# Altium PCB PCB1.PcbDoc
Units mil, origin at the board's own origin, x right, y up, seen from the top; angles counter-clockwise.
Board outline 4809.97 x 3955.21 mil, 2 copper layers (Top Layer, Bottom Layer); 10 components, 11 nets, 59 pads, 0 vias.
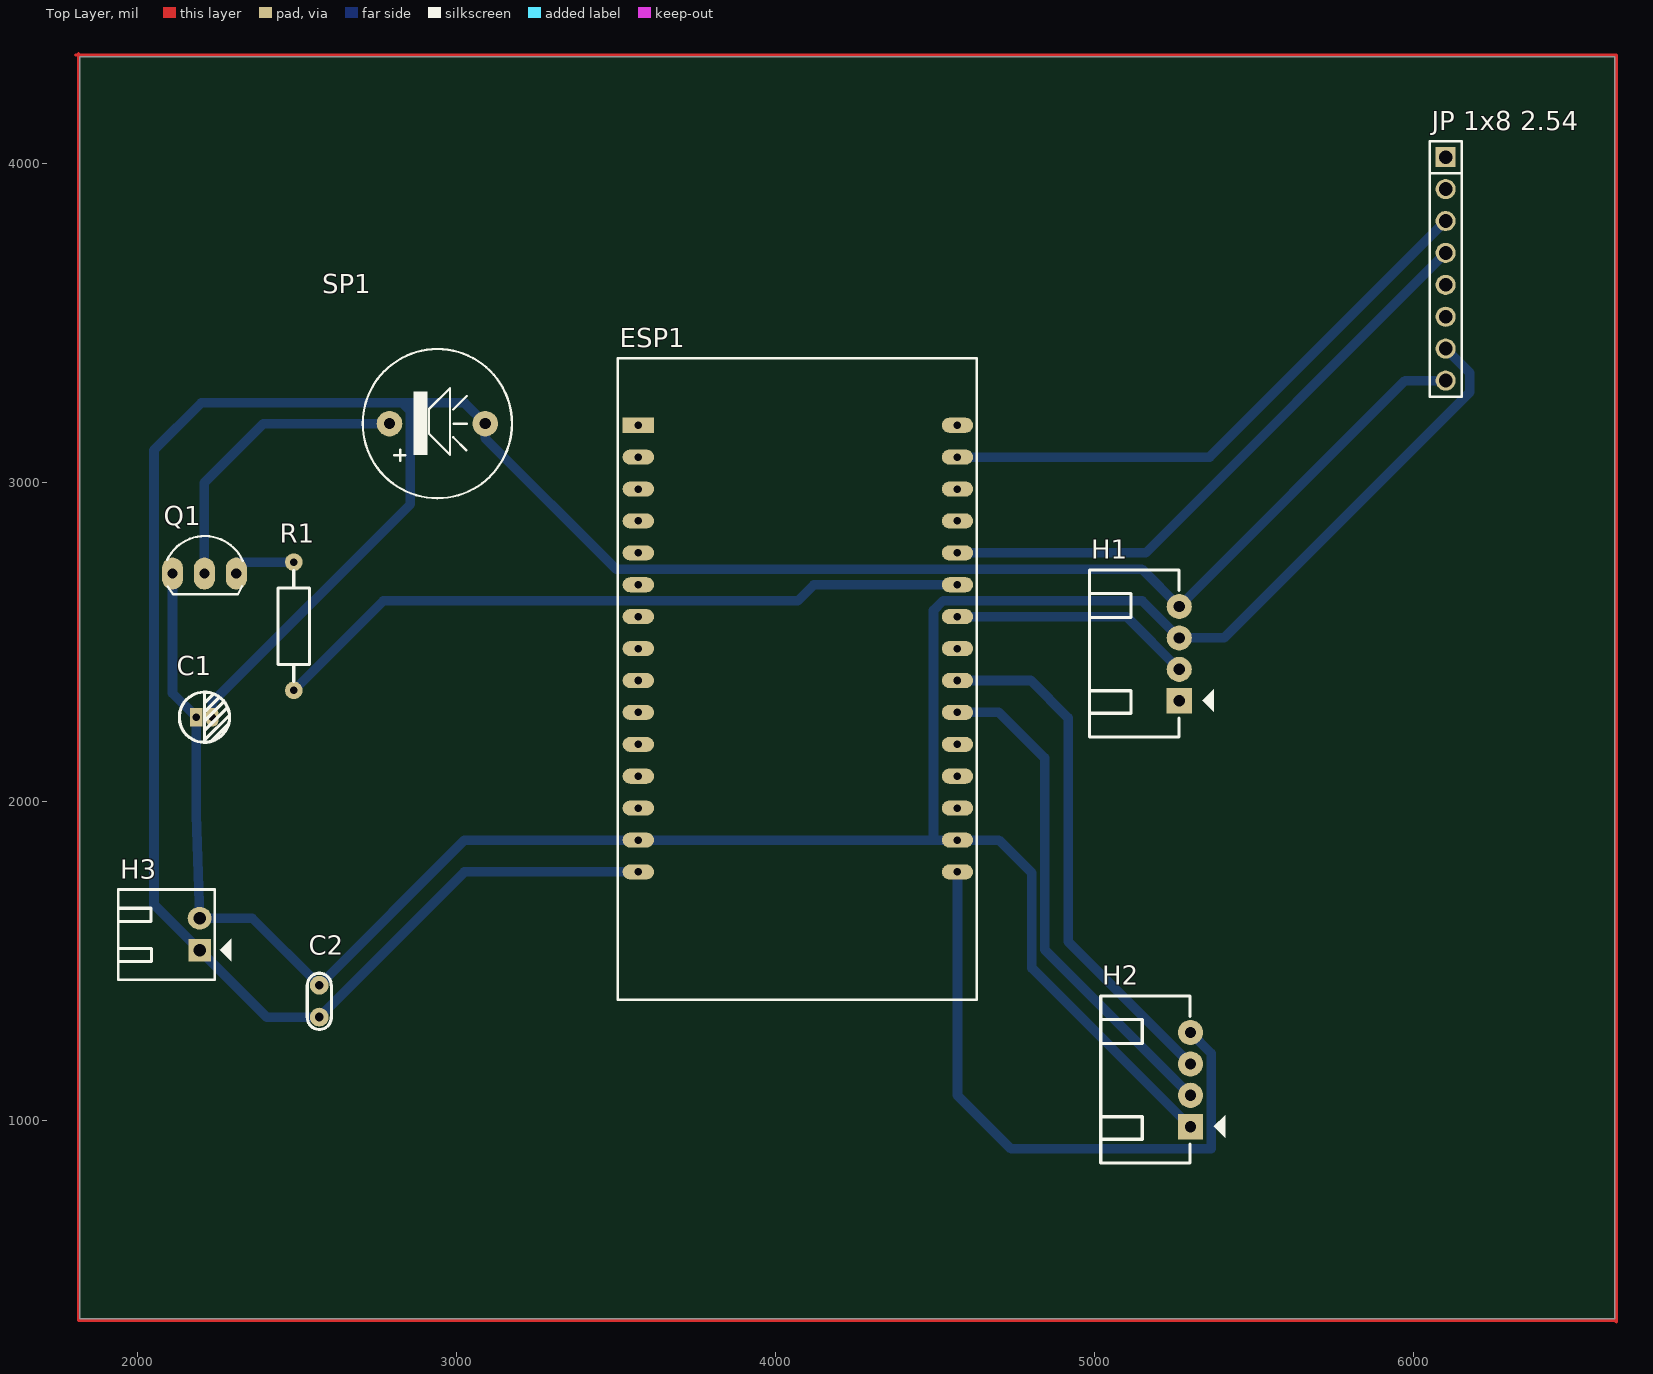
[diagram p0: Top Layer view]
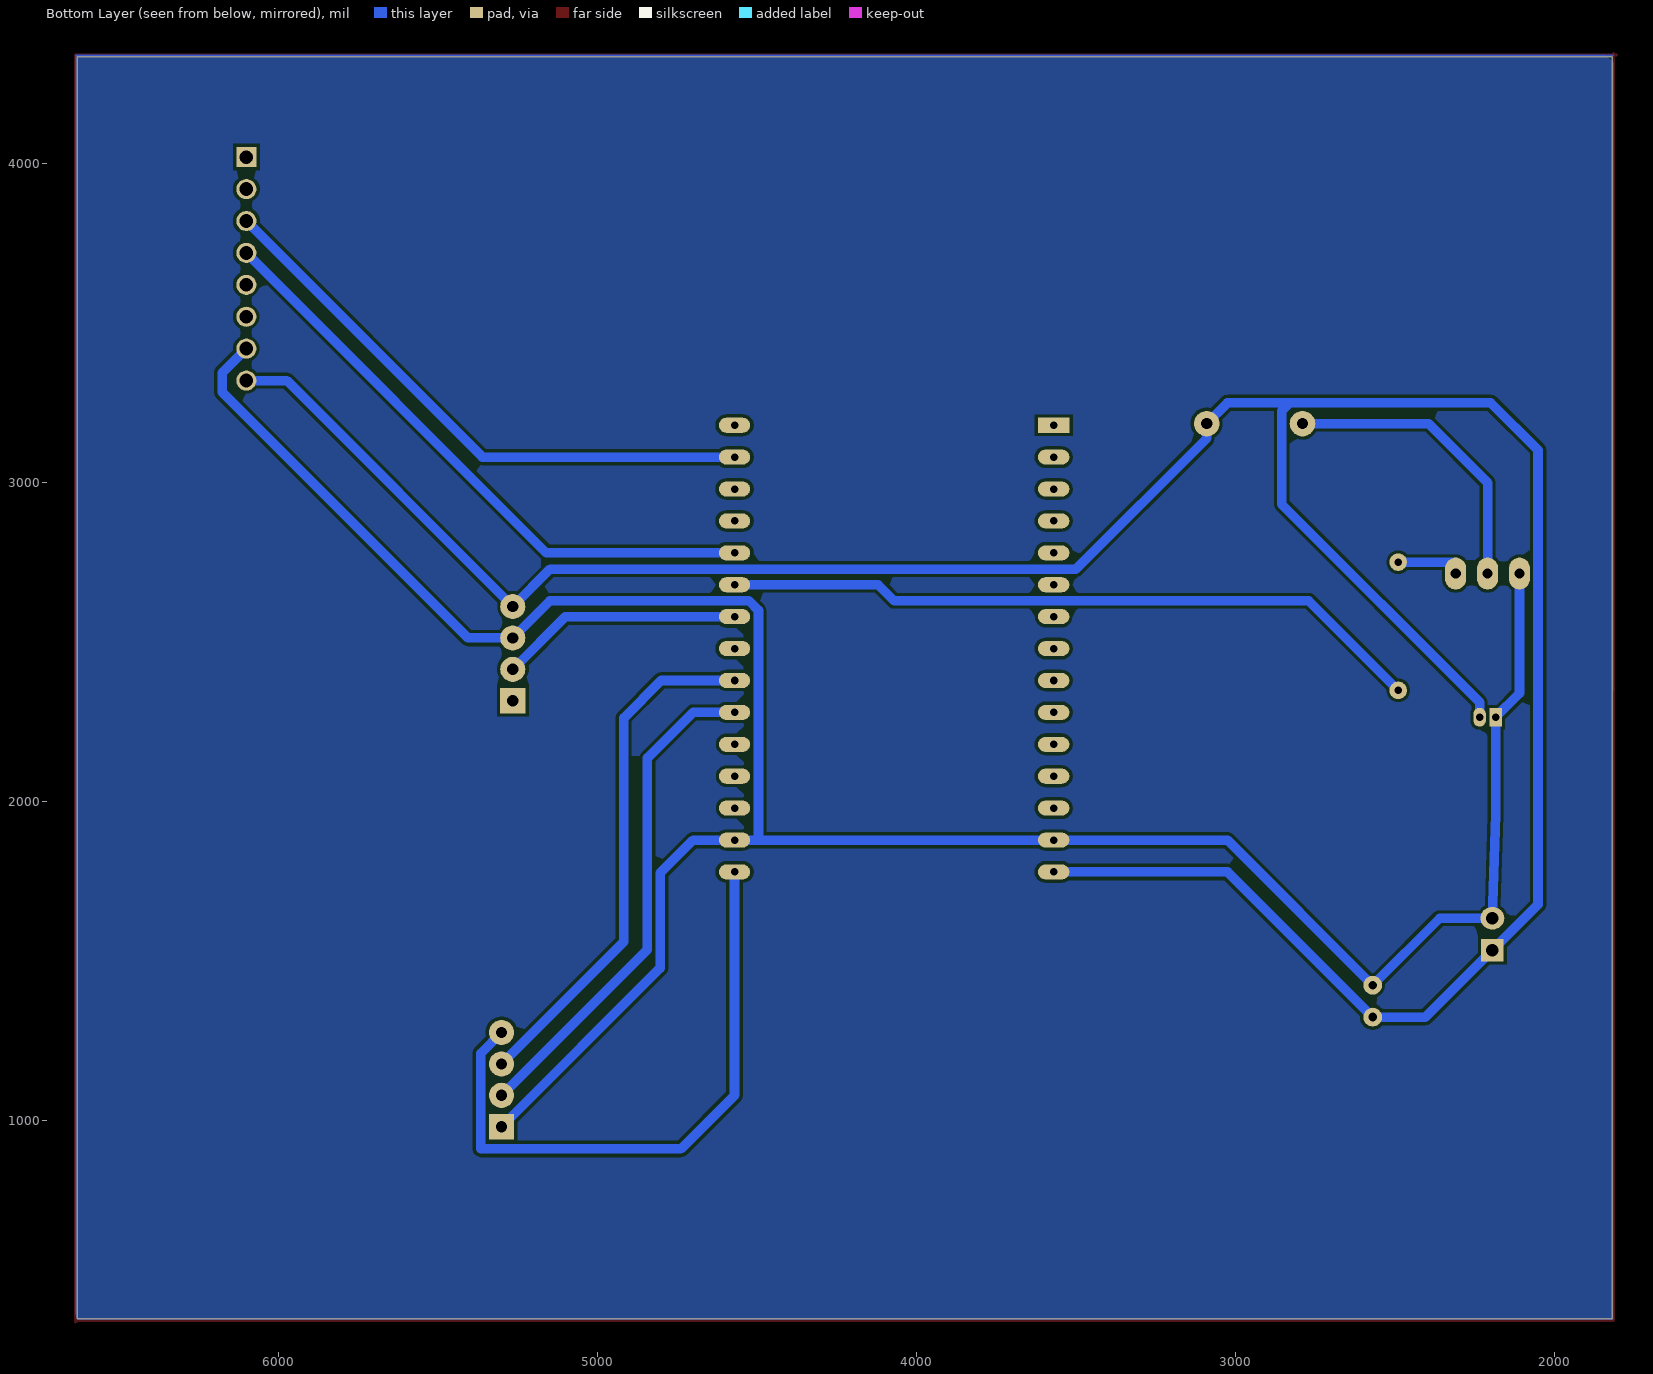
[diagram p1: Bottom Layer view, seen from below]
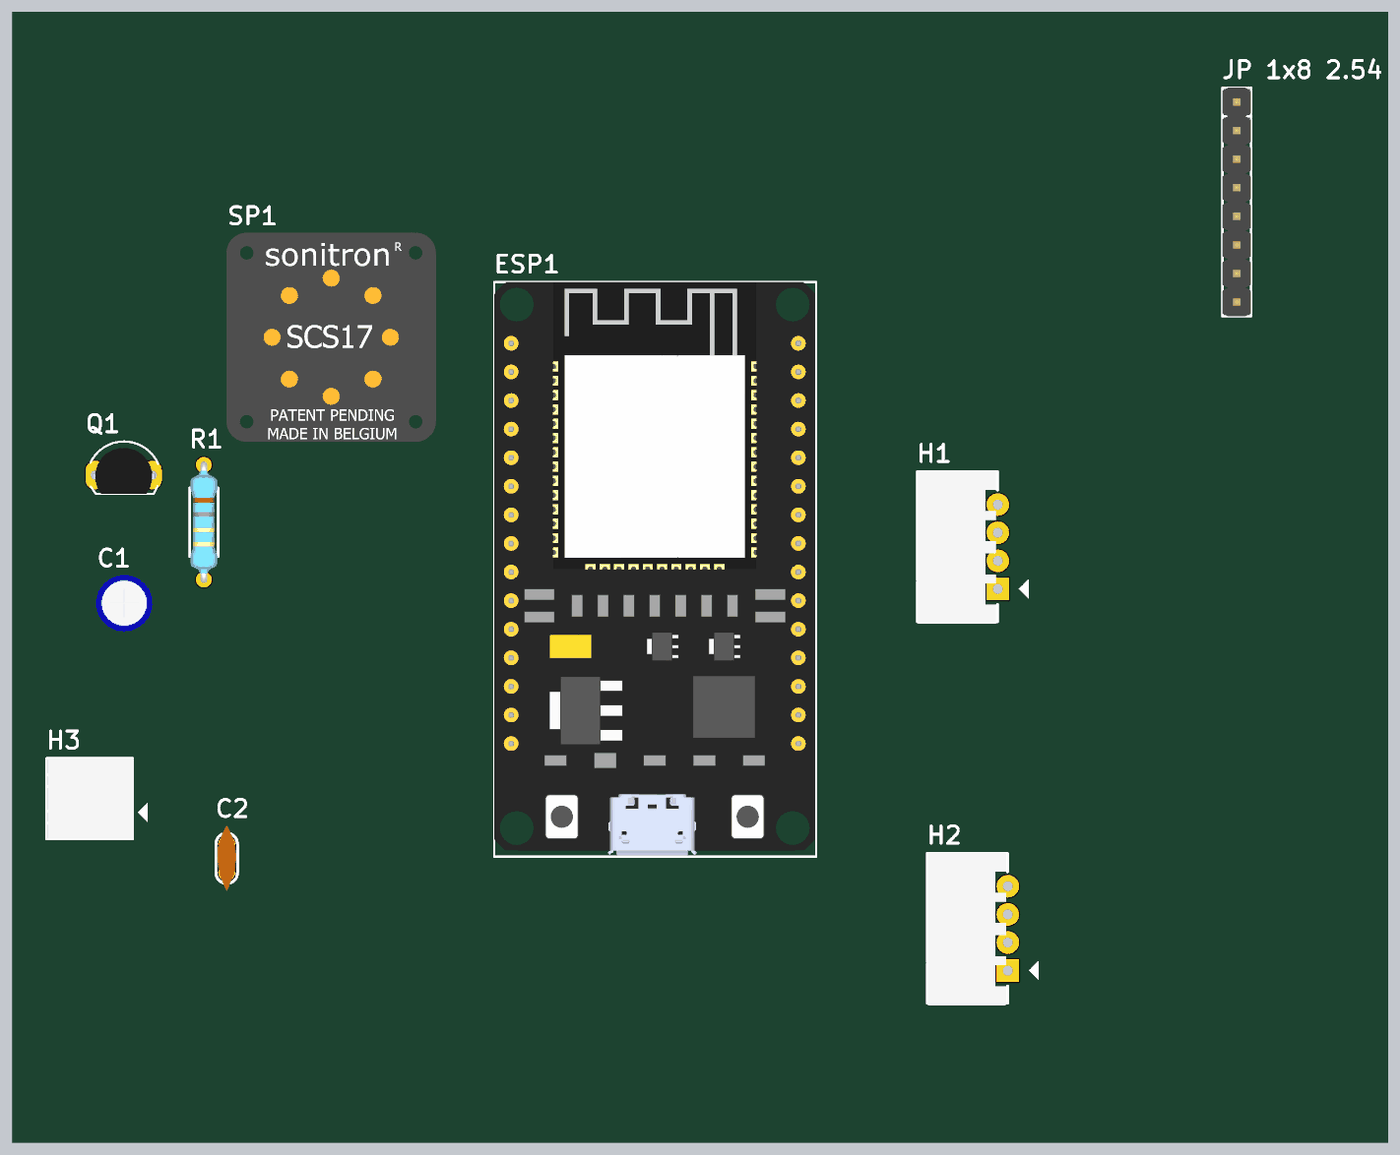
[diagram p2: 3D render of the assembled board from above, using the file's embedded part models]

## Layer stack, top to bottom
Top Solder: solder mask 0.4, Solder Resist, Dk 3.5
Top Layer: signal copper 1.4
Dielectric 1: dielectric 12.6, FR-4, Dk 4.8
Bottom Layer: signal copper 1.4
Bottom Solder: solder mask 0.4, Solder Resist, Dk 3.5

## Board outline
1820.02,380.01 1820.02,4335.23 6629.98,4335.23 6629.98,380.01

## Design rules (kind name [scope] priority, off if disabled: settings)
Clearance [All] p1: gap=10 ignorepadtopadclearanceinfootprint=FALSE
PolygonConnect [All] p1: connectstyle=Relief reliefconductorwidth=10 reliefentries=4 polygonreliefangle="90 Angle" airgapwidth=10
RoutingLayers [All] p1: top layer_v5=FALSE bottom layer_v5=TRUE
RoutingVias [All] p1: holewidth=28 width=50 viastyle="Through Hole" minholewidth=28 minwidth=50 maxholewidth=28 maxwidth=50
SolderMaskExpansion [All] p1: expansion=4 istentingtop=FALSE
SupplyNets "Schematic Supply Nets_2" [InNet('VCC')] p1: voltage=0.000
SupplyNets "Schematic Supply Nets_1" [InNet('GND')] p2: voltage=0.000
SupplyNets "Schematic Supply Nets" [InNet('+5')] p3: voltage=0.000
Width Width_Power [All] p1: maxlimit=50 minlimit=24 preferedwidth=30
Width [All] p2: maxlimit=30 minlimit=12 preferedwidth=15
29 further rules are at their usual default settings.

## Components (designator, comment, footprint, x,y, rotation, side; value= is the part's Value field where it differs from the comment)
C1 "22uF" "tu hoa 4mm" 2210,2265 r0 top
C2 "104" "tu gom" 2570,1375 r90 top
ESP1 "ESP32 DEVKIT" "ESP32 WROOM 32 KIT" 3570,3180 r0 top
H1 "ITR9606" "Header 4P DC 2.54" 5264,2317.57 r180 top
H2 "ADC HX711" "Header 4P DC 2.54" 5299,982.57 r180 top
H3 "Header 2P 2.54 Duc Cong" "Header 2P DC 2.54" 2195,1535 r180 top
"JP 1x8 2.54" "oled" "JP 1x8 DT" 6100,4020 r270 top
Q1 "C1815" TO92 2210,2715 r0 top value=C9014
R1 "330R" "tro vach 1/4w" 2490,2550 r90 top
SP1 "Speaker" SPK 2790,3185 r0 top value="Speaker Chip"

## Footprints (in the part's own frame and the unit in brackets; to place one, negate y for a bottom-side part, rotate by r counter-clockwise, add the part's x,y. Pads: shape width x height; smd on the part's side, far side on the other; paste and mask are expansions set on the pad)
"ESP32 WROOM 32 KIT" [mm]
  rect 2.5x1.2 hole 0.6: 1(0,0)
  oval 2.5x1.2 hole 0.6: 2(0,-2.54) 3(0,-5.08) 4(0,-7.62) 5(0,-10.16) 6(0,-12.7) 7(0,-15.24) 8(0,-17.78) 9(0,-20.32) 10(0,-22.86) 11(0,-25.4) 12(0,-27.94) 13(0,-30.48) 14(0,-33.02) 15(0,-35.56) 16(25.4,-35.56) 17(25.4,-33.02) 18(25.4,-30.48) 19(25.4,-27.94) 20(25.4,-25.4) 21(25.4,-22.86) 22(25.4,-20.32) 23(25.4,-17.78) 24(25.4,-15.24) 25(25.4,-12.7) 26(25.4,-10.16) 27(25.4,-7.62) 28(25.4,-5.08) 29(25.4,-2.54) 30(25.4,0)
  silkscreen extent -1.65,-45.72 26.92,5.33, body extent -1.65,-45.6 26.85,5.33, height 10.49
"Header 2P DC 2.54" [mil]
  rect 70x70 hole 39.37 unplated: 1(0,0)
  oval 75x70 hole 39.37 unplated: 2(0,-100)
  silkscreen extent -100,-190 255,93, body extent -50,-190 250,90, height 237
"Header 4P DC 2.54" [mil]
  rect 78.74x78.74 hole 35: 1(-1,1)
  round 78.74 hole 35: 2(-1,-97.43) 3(-1,-195.85) 4(-1,-294.28)
  silkscreen extent -110,-409 280,115, body extent 5,-413 278,123, height 290
"JP 1x8 DT" [mm] "8 pins, 1 row, straight, gold plating"
  rect 1.6x1.6 hole 1.1: 1(0,0)
  round 1.6 hole 1.1: 2(2.54,0) 3(5.08,0) 4(7.62,0) 5(10.16,0) 6(12.7,0) 7(15.24,0) 8(17.78,0)
  silkscreen extent -1.27,-1.27 19.05,1.27, body extent -1.27,-1.27 19.05,1.27, height 8.54
SPK [mil] "Speaker Chip"
  round 80 hole 35: 1(0,0) 2(300,0)
  silkscreen extent -84,-234 384,234, body extent -221,-354 511,378, height 344
TO92 [mil] "TO-92"
  oval 66x100 hole 32: 1(-100,0) 2(0,0) 3(100,0)
  silkscreen extent -117,-65 120,118, body extent -109,-66 109,95, height 245
"tro vach 1/4w" [mm]
  round 1.4 hole 0.6: 1(-5.1,0) 2(5.1,0)
  silkscreen extent -4.39,-1.25 4.42,1.25, body extent -5.38,-1.2 5.38,1.2, height 2.41
"tu gom" [mm] "Tu gom mini"
  round 1.5 hole 0.7: 1(-1.27,0) 2(1.27,0)
  silkscreen extent -2.25,-0.97 2.22,0.97, body extent -2.92,-0.85 2.92,0.85, height 6.12
"tu hoa 4mm" [mm]
  rect 1x1.5 hole 0.6: 1(-0.635,0)
  oval 1x1.5 hole 0.6: 2(0.635,0)
  silkscreen extent -2,-2 2.01,2.01, body extent -2.47,-2.47 2.58,2.58, height 14.81

## Part data
C1: library part "Tu Hoa 22uF 16V 4x7", "Cắm", Chung_Loai=Cắm, Don_Vi=Con, Ma_Hang=MH006857, So_Chan=2, Ten_Linh_Kien="Tụ Hóa 22uF 16V"
C2: library part "Tu gom 104 50V", "Cắm", Chung_Loai=Cắm, Don_Vi=Con, Ma_Hang=MH004761, So_Chan=2, Ten_Linh_Kien="Tụ gốm 104 100nF 50V"
ESP1: library part "ESP32 WROOM 32 KIT"
H1 H2: library part "Header 4P 2.54 Duc Cong", "Cắm", Chung_Loai=Cắm, Don_Vi=Con, Ma_Hang=MH001310, Ten_Linh_Kien="Header 4P XH2.54-4P Đực Cong"
H3: "Cắm", Chung_Loai=Cắm, Don_Vi=Con, Ma_Hang=MH002852, Ten_Linh_Kien="Header 2P XH2.54-2P Đực Cong"
"JP 1x8 2.54": library part "JP 1x8 2.54 Duc Thang", "Cắm", Chung_Loai=Cắm, Don_Vi=Con, Ma_Hang=MH000903, Ten_Linh_Kien="Jump Đơn Đực 2.54MM 1x40P Thẳng 11MM"
Q1: library part "Trans C1815 DIP", "NPN transistor"
R1: library part "Tro Vach 1/4W 1% 330R", "Cắm", Chung_Loai=Cắm, Don_Vi=Con, Ma_Hang=MH006348, So_Chan=2, Ten_Linh_Kien="Trở Vạch 1/4w 1% 330R"
SP1: library part SPK, "Speaker Chip"

## Nets (pads, with @x,y where several pads share a name; then routed paths per layer and width w, separated by ;. In a path a pad name is that pad's centre, name@x,y a point inside that pad or via, vN(x,y) a via of type N, cw(c..) or ccw(c..) an arc to the next point about the centre after c; other vN are vias at no path point)
+5: "JP 1x8 2.54.8" C1.2 C2.1 ESP1.15 H1.4 H3.1 SP1.2 | length 9222.8
  Bottom Layer w30: C1.2 2235,2312 2855,2932 2855,3225 2830,3250 ; ESP1.15 3025,1780 C2.1 2405,1325 H3.1 2052,1678 2052,3102 2200,3250 2830,3250 ; 6100,3320 5973.15,3320 H1.4 5147.85,2729 3500,2729 3090,3139 SP1.2 3025,3250 2830,3250
BUZZER_CTRL: ESP1.25 R1.1 | length 2217
  Bottom Layer w30: R1.1 2770.79,2630 4070,2630 4120,2680 ESP1.25
DROP_COUNT: ESP1.24 H1.2 | length 763.3
  Bottom Layer w30: ESP1.24 5100,2580 H1.2
GND: "JP 1x8 2.54.7" C1.1 C2.2 ESP1.14 ESP1.17 H1.3 H2.1 H3.2 Q1.1 | length 7986.2
  Bottom Layer w30: Q1.1 2110,2340 C1.1 2185,1960 H3.2 2360,1635 C2.2 3025,1880 ESP1.14 4495,1880 ; H2.1 4803,1478.57 4803,1777 4700,1880 ESP1.17 4495,1880 ; 6100,3420 6175,3345 6175,3283 5405.42,2513.42 H1.3 5148.42,2630 4525,2630 4495,2600 4495,1880
HX711_DT: ESP1.21 H2.2 | length 1578.5
  Bottom Layer w30: ESP1.21 4700,2280 4843,2137 4843,1537 H2.2
HX711_SCK: ESP1.22 H2.3 | length 1638.7
  Bottom Layer w30: ESP1.22 4800,2380 4917,2263 4917,1561.42 H2.3
NetQ1_2: Q1.2 SP1.1 | length 941.6
  Bottom Layer w30: Q1.2 2210,3000 2395,3185 SP1.1
NetQ1_3: Q1.3 R1.2 | length 215.8
  Bottom Layer w30: Q1.3 2310,2750.79 R1.2
OLED_SCL: "JP 1x8 2.54.3" ESP1.29 | length 1836.5
  Bottom Layer w30: ESP1.29 5360,3080 6100,3820
OLED_SDA: "JP 1x8 2.54.4" ESP1.26 | length 1919.4
  Bottom Layer w30: ESP1.26 5160,2780 6100,3720
VCC: ESP1.16 H2.4 | length 1956.4
  Bottom Layer w30: ESP1.16 4570,1080 4738,912 5365,912 5365,1211.85 H2.4
pads on no net: "JP 1x8 2.54.1" "JP 1x8 2.54.2" "JP 1x8 2.54.5" "JP 1x8 2.54.6" ESP1.1 ESP1.2 ESP1.3 ESP1.4 ESP1.5 ESP1.6 ESP1.7 ESP1.8 ESP1.9 ESP1.10 ESP1.11 ESP1.12 ESP1.13 ESP1.18 ESP1.19 ESP1.20 ESP1.23 ESP1.27 ESP1.28 ESP1.30 H1.1
copper on no net: | length 17591.2
  Top Layer w10: 1805.93,4340.24 6634.76,4340.24 6635,4340 6635,370 6630,375 1815,375 1815,4305 1815,4345

## Polygon pours and split planes (outlines as drawn)
no net on Bottom Layer "NONET_L02_P002" (solid, pour order 2): 1815.06,4340.06 1816.25,4338.88 6635.4,4338.88 6635.4,370.4 6635,370 6629.15,375.85 1816.79,375.85
no net on Bottom Layer "NONET_L02_P000" (solid, pour order 0): 1815,4340 1815.06,4340.06 6635.26,4340.06